# Altium PCB Antenna_base_v3.PcbDoc (part 2 of 2)
Units mil, origin at the board's own origin, x right, y up, seen from the top; angles counter-clockwise.
Board outline 2245 x 2630 mil, 2 copper layers (Top Layer, Bottom Layer); 85 components, 87 nets, 365 pads, 73 vias.
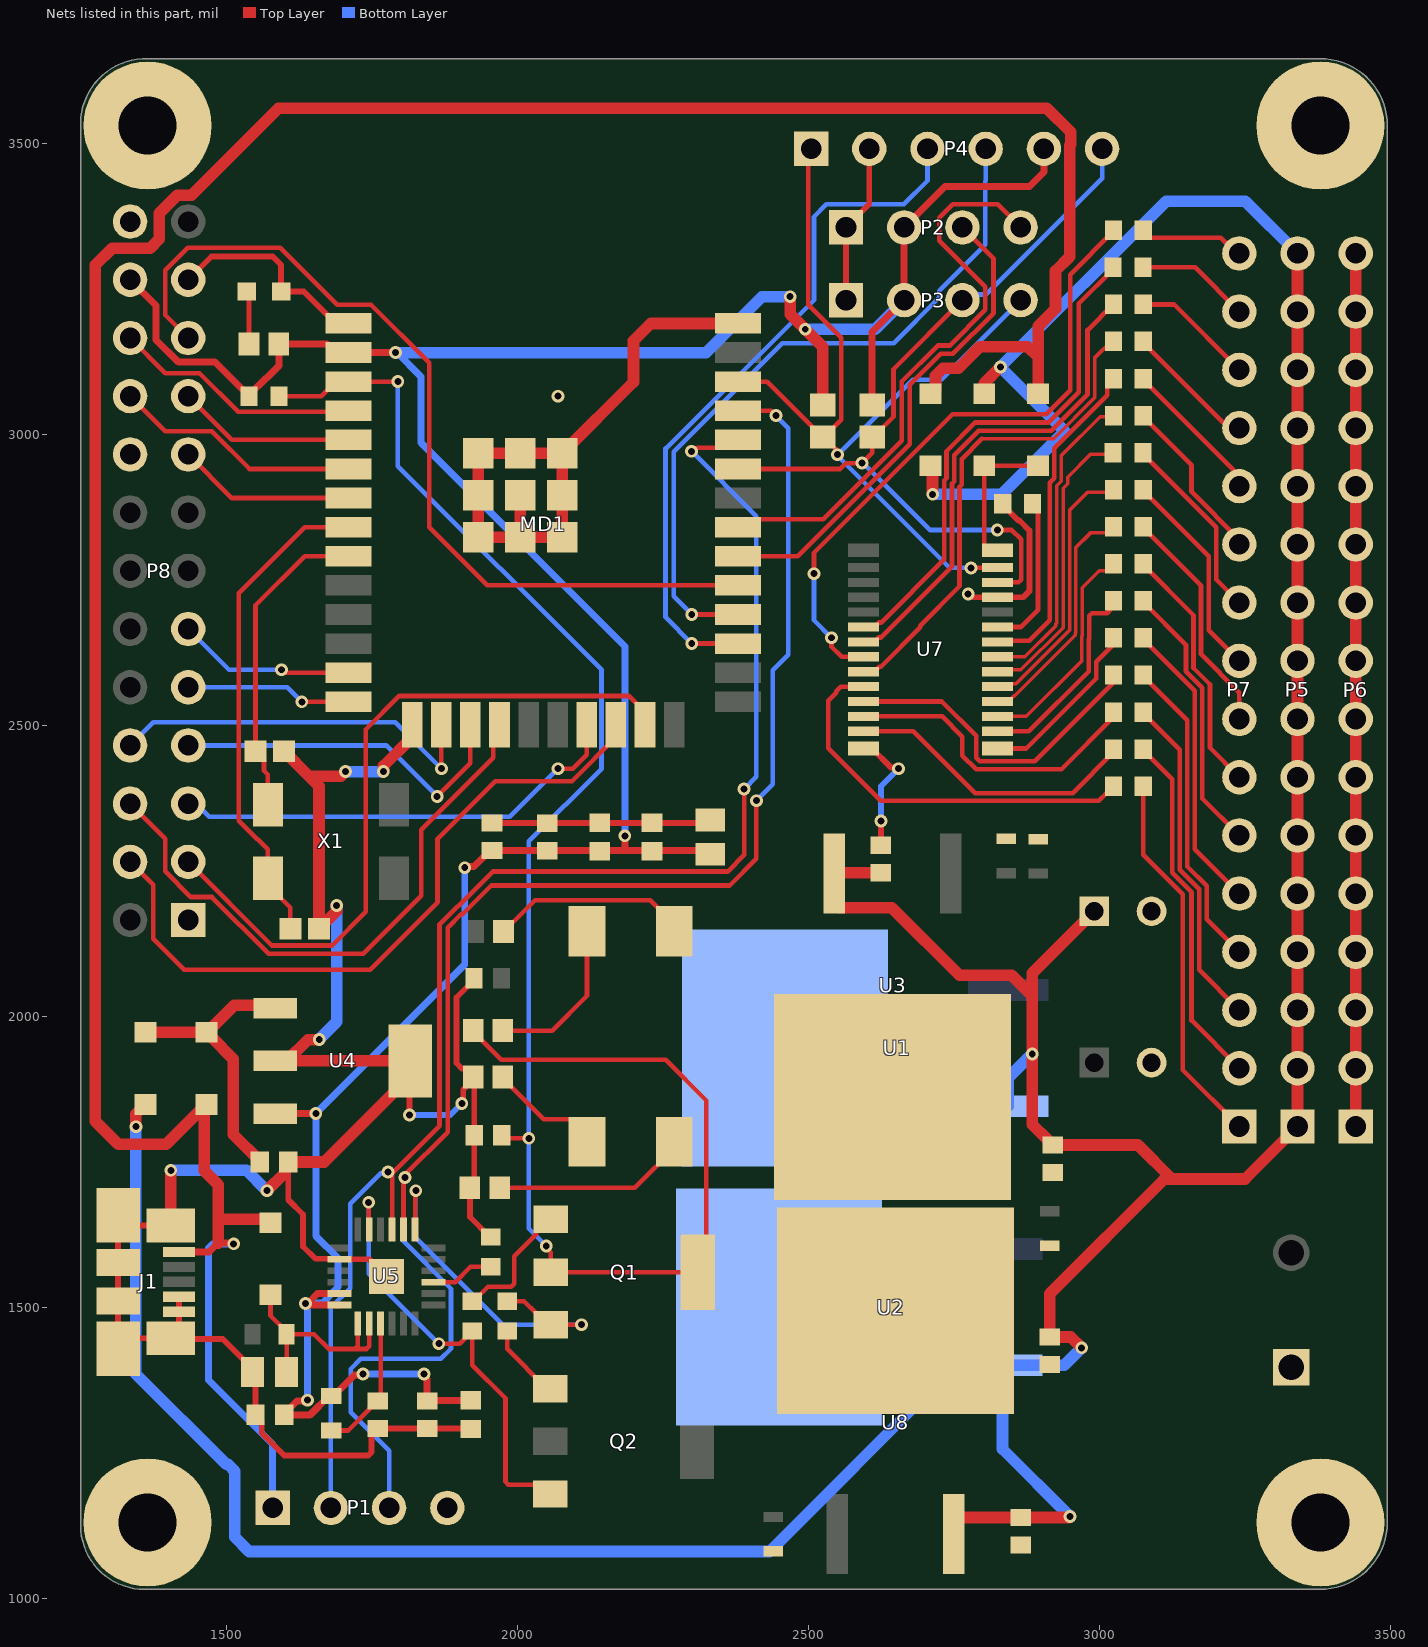
[diagram p2: the nets of this part, all layers, seen from the top]

## Via types
v1: diameter 22, hole 12, Top Layer to Bottom Layer, 73 vias

## Nets (pads, with @x,y where several pads share a name; then routed paths per layer and width w, separated by ;. In a path a pad name is that pad's centre, name@x,y a point inside that pad or via, vN(x,y) a via of type N, cw(c..) or ccw(c..) an arc to the next point about the centre after c; other vN are vias at no path point) (continued)
DTR: Q2.3 R6.1 U5.23 | length 774.6
  Top Layer w8: v1(1745,1680) 1745,1634.22 U5.23@1745.81,1633.41 ; v1(1865.41,1437.11) 1901.28,1437.11 R6.1@1923.03,1458.86 1923.03,1400.03 1980,1343.06 1980,1200 1985,1195 2040.94,1195 Q2.3@2057.05,1178.9
  Bottom Layer w8: v1(1745,1680) 1745,1557.51 v1(1865.41,1437.11)
EN: C12.1 MD1.3 Q1.2 R1.2 R8.2 | length 3010.3
  Top Layer w8: R1.2@1590.59,3065 1663.35,3065 1688.35,3090 MD1.3@1710,3090 v1(1795,3090) ; R8.2@1924.41,1975 1924.41,1973.03 1972.76,1924.69 2255.31,1924.69 2325,1855 2325,1575 Q1.2@2310,1560 Q1.2@2058.03,1560 2058.03,1593.85 2050,1601.88 v1(2050,1605) ; C12.1@1973.62,1795 1978.62,1790 v1(2020,1790)
  Bottom Layer w8: v1(1795,3090) 1795,2945 2145,2595 2145,2425 2020,2300 v1(2020,1790) 2020,1635 v1(2050,1605)
GND: C1.2 C2.1 C3.2 C4.1 C5.2 C6.1 C7.1 C8.1 C9.2 C10.2 C11.1 C12.2 C13.2 C14.2 C15.2 C18.2 C19.1 C22.1 C23.1 C24.1 C25.2 C26.2 C27.1 C28.1 C29.1 D8.1 J1.4 J1.5 J1.6 J1.7 J1.8 J1.9 J1.10 J1.11 J5.1 MD1.1 MD1.15 MD1.38 MD1.39 P1.4 P2.1 P3.1 P4.2 P6.1 P6.2 P6.3 P6.4 P6.5 P6.6 P6.7 P6.8 P6.9 P6.10 P6.11 P6.12 P6.13 P6.14 P6.15 P6.16 P8.1 P8.18 P8.23 P8.26 pad.C1 pad.C2 pad.C3 pad.C4 R10.1 R11.1 R24.2 R45.2 U1.4 U2.4 U3.4 U4.2 U4.4 U5.2 U5.25 U7.14 U7.25 U8.4 | length 8073.9
  Top Layer w10: J1.6@1404.92,1640.37 1332.09,1640.37 J1.8@1314.37,1658.09 J1.9@1314.37,1576.4 J1.10@1314.37,1510.45 J1.11@1314.37,1428.76 1332.09,1446.48 J1.7@1404.92,1446.48 ; J1.4@1419.09,1517.83 J1.5@1419.09,1492.24 1419.09,1460.65 J1.7@1404.92,1446.48 ; P8.23@1435,3265 1475,3305 1580,3305 1594.53,3290.47 D8.1@1594.53,3245 1633.35,3245 1688.35,3190 MD1.1@1710,3190 ; C8.1@1606.85,1749.21 1606.85,1684.61 1632.24,1659.21 1632.24,1604.21 1653.39,1583.07 1693.66,1583.07 U5.2@1694.57,1582.17 1745.81,1582.17 U5.25@1775.34,1552.64 ; v1(1815,1830) 1815,1895.75 1815,1921.34 U4.4@1816.61,1922.95 ; v1(1905,1850) 1907.3,1852.3 1907.3,1873.95 1911.69,1878.35 1911.69,1880.31 1924.41,1893.03 1926.38,1893.03 C12.2@1926.38,1795 1926.38,1712.56 R11.1@1918.82,1705 1918.82,1654.8 1953.03,1620.59 R45.2@1955,1620.59 ; 1905,1910 1895.69,1919.31 1895.69,2031.83 1925.94,2062.09 C13.2@1925.94,2065.04 ; C11.1@1919.49,1291.57 C10.2@1845.47,1291.57 C9.2@1760.47,1291.57 1759.76,1291.57 1750,1281.81 1750,1250.86 1744.14,1245 1600,1245 1561.14,1283.86 1561.14,1304.25 C7.1@1550.39,1315 1550.39,1383.07 C29.1@1545.04,1388.43 1545.04,1394.33 1494.37,1445 1406.4,1445 J1.7@1404.92,1446.48 ; C25.2@1956.73,2331.73 2326.42,2331.73 C24.1@2331.73,2337.05 ; P3.1@2565,3230 P2.1@2565,3355 2605,3395 P4.2@2605,3490 ; U7.14@2594.84,2459.72 2609.61,2459.72 2642.03,2427.3 2652.7,2427.3 v1(2655,2425) ; C5.2@2625,2293.62 v1(2625,2335) ; v1(2775,2725) 2778.25,2725 2783.68,2719.57 U7.25@2825.16,2719.57 2869.57,2719.57 2880,2730 2880,2834.41 2863.07,2851.34 2861.1,2851.34 2834.41,2878.03 R24.2@2834.41,2880
  Top Layer w20: J1.6@1404.92,1640.37 1405,1640.45 v1(1405,1735) ; v1(1570,1700) 1601.1,1731.1 ; U4.2@1584.33,1922.95 U4.2@1604.02,1922.95 ; C28.1@1599.61,2455 1642.3,2412.3 ; C8.1@1606.85,1749.21 1668.46,1749.21 U4.4@1815,1895.75 ; v1(1660,1960) 1659.62,1959.62 1640.68,1959.62 U4.2@1604.02,1922.95 ; v1(1690,2190) 1689.62,2189.62 1689.62,2180.01 C27.1@1659.61,2150 1659.61,2395 1642.3,2412.3 ; v1(1705,2420) 1697.3,2412.3 1642.3,2412.3 ; v1(1770,2420) 1770.38,2420.38 1770.38,2429.71 1819.65,2478.98 MD1.15@1819.65,2500.63 ; U4.4@1816.61,1922.95 U4.2@1604.02,1922.95 ; MD1.39@2005.28,2894.72 MD1.39@2005.28,2822.48 ; MD1.38@2379.29,3190 2230,3190 2200,3160 2200,3089.45 MD1.39@2077.52,2966.97 ; P6.1@3440.79,1810.35 P6.2@3440.79,1910.35 P6.3@3440.79,2010.35 P6.4@3440.79,2110.35 P6.5@3440.79,2210.35 P6.6@3440.79,2310.35 P6.7@3440.79,2410.35 P6.8@3440.79,2510.35 P6.9@3440.79,2610.35 P6.10@3440.79,2710.35 P6.11@3440.79,2810.35 P6.12@3440.79,2910.35 P6.13@3440.79,3010.35 P6.14@3440.79,3110.35 P6.15@3440.79,3210.35 P6.16@3440.79,3310.35 ; MD1.39@2005.28,2822.48 MD1.39@1933.03,2822.48 MD1.39@1933.03,2894.72 MD1.39@1933.03,2966.97 MD1.39@2005.28,2966.97 MD1.39@2077.52,2966.97 ; MD1.39@2005.28,2822.48 MD1.39@2077.52,2822.48 MD1.39@2077.52,2894.72 MD1.39@2077.52,2966.97
  Bottom Layer w10: v1(1815,1830) 1885,1830 v1(1905,1850) ; v1(2625,2335) 2625,2395 v1(2655,2425)
  Bottom Layer w20: v1(1405,1735) 1535,1735 v1(1570,1700) ; v1(1660,1960) 1690,1990 v1(1690,2190) ; v1(1705,2420) v1(1770,2420)
  other v1: 2070,3065
I2C_SCL: MD1.30 P2.3 | length 841.3
  Top Layer w8: MD1.30@2379.29,2790 2482,2790 2674.56,2982.57 2674.56,3084.42 2728.15,3138 2748.7,3138 2818.53,3207.83 2818.53,3301.47 P2.3@2765,3355
I2C_SCL2: MD1.33 P3.3 P4.6 R23.1 U7.26 | length 1421.4
  Top Layer w8: MD1.33@2379.29,2940 2555,2940 2565,2950 v1(2592.5,2950) 2610,2967.5 R23.1@2610,2995 ; R23.1@2592.35,2979.31 2608.03,2995 R23.1@2610,2995 ; P3.3@2765,3230 2646.56,3111.56 2646.56,3029.6 2611.97,2995 R23.1@2610,2995 ; v1(2825,2835) 2850,2835 2866,2819 2866,2749.84 2861.31,2745.16 U7.26@2825.16,2745.16
  Top Layer w20: P3.3@2765,3230 P3.3@2772.11,3237.11
  Bottom Layer w8: v1(2592.5,2950) 2595,2950 2710,2835 v1(2825,2835) ; P3.3@2765,3230 2774.77,3239.77 2805.67,3239.77 3005,3439.1 P4.6@3005,3490
I2C_SDA: MD1.31 P2.4 | length 995.6
  Top Layer w8: MD1.31@2379.29,2840 2393.01,2853.72 2525.91,2853.72 2660.56,2988.37 2660.56,3090.21 2722.35,3152 2742.9,3152 2804.53,3213.63 2804.53,3252.97 2725.47,3332.03 2725.47,3371.37 2748.63,3394.53 2825.47,3394.53 P2.4@2865,3355
I2C_SDA2: MD1.36 P3.4 P4.1 R22.1 U7.27 | length 1542.3
  Top Layer w8: MD1.36@2379.29,3090 2429.64,3090 2507.35,3012.29 2507.35,3010.69 2523.03,2995 R22.1@2525,2995 R22.1@2526.97,2995 ; P4.1@2505,3490 2500,3485 2500,3221.8 2556.65,3165.15 2556.65,3024.69 R22.1@2526.97,2995 ; v1(2550.58,2964.42) 2548.67,2966.33 2548.67,2973.3 R22.1@2526.97,2995 ; v1(2780,2770) 2824.41,2770 U7.27@2825.16,2770.75
  Bottom Layer w8: v1(2780,2770) 2742.8,2770 2550.58,2962.22 v1(2550.58,2964.42) 2679.44,3093.28 2728.28,3093.28 P3.4@2865,3230
IO5: MD1.29 P8.21 | length 1538.1
  Top Layer w8: P8.21@1435,3165 1395.47,3204.53 1395.47,3281.37 1434.1,3320 1593.02,3320 1690.76,3222.27 1748.96,3222.27 1848.98,3122.24 1848.98,2840.02 1949.01,2740 MD1.29@2379.29,2740
IO12: MD1.14 P8.9 | length 285.4
  Top Layer w8: v1(1630,2540) MD1.14@1710,2540
  Bottom Layer w8: P8.9@1435,2565 1605,2565 v1(1630,2540)
IO13: MD1.16 P8.8 | length 660.1
  Top Layer w8: MD1.16@1869.65,2500.63 1869.65,2425.35 v1(1870,2425)
  Bottom Layer w8: P8.8@1335,2465 1374.53,2504.53 1790.47,2504.53 v1(1870,2425)
IO14: MD1.13 P8.11 | length 306.1
  Top Layer w8: v1(1595,2595) 1598.79,2595 1603.79,2590 MD1.13@1710,2590
  Bottom Layer w8: P8.11@1435,2665 1505,2595 v1(1595,2595)
IO15: MD1.23 P8.3 | length 1238.4
  Top Layer w8: P8.3@1435,2265 1578.7,2121.3 1682.45,2121.3 1740.12,2178.97 1740.12,2492.33 1797.79,2550 2191.93,2550 2219.65,2522.28 MD1.23@2219.65,2500.63
IO16: MD1.27 P4.3 | length 1212.4
  Top Layer w8: v1(2300,2640) MD1.27@2379.29,2640
  Bottom Layer w8: v1(2300,2640) 2255,2685 2255,2975 2510,3230 2510,3373.2 2531.33,3394.53 2664.53,3394.53 2705,3435 P4.3@2705,3490
IO17: MD1.28 P4.4 | length 1231.2
  Top Layer w8: v1(2300,2690) MD1.28@2379.29,2690
  Bottom Layer w8: v1(2300,2690) 2269,2721 2269,2969.2 2455.8,3156 2646.9,3156 2725.47,3234.57 2725.47,3246.37 2804.53,3325.43 2804.53,3434.53 2805,3435 P4.4@2805,3495.12
IO32: C27.2 MD1.8 X1.1 | length 849
  Top Layer w8: C27.2@1610.39,2150 1610.39,2186.54 1571.73,2225.2 X1.1@1571.73,2237.01 1571.73,2286.41 1554.21,2303.93 1553.66,2303.93 1521.69,2335.9 1521.69,2726.69 1635,2840 MD1.8@1710,2840
IO33: C28.2 MD1.9 X1.4 | length 566.7
  Top Layer w8: C28.2@1535.69,2460 C28.2@1550.39,2445.3 ; X1.4@1571.73,2362.99 1571.73,2415.03 1565.09,2421.67 1565.09,2440.3 C28.2@1550.39,2455 1550.39,2705.39 1635,2790 MD1.9@1710,2790
IO34: MD1.6 P8.20 | length 426.8
  Top Layer w8: P8.20@1335,3065 1395.47,3004.53 1475.67,3004.53 1540.2,2940 MD1.6@1710,2940
IO35: MD1.7 P8.17 | length 306.1
  Top Layer w8: P8.17@1435,2965 1510,2890 MD1.7@1710,2890
LED0: R2.1 U7.6 | length 881.7
  Top Layer w8: U7.6@2594.84,2668.39 2613.54,2668.39 2621.26,2676.1 2625.56,2676.1 2734,2784.54 2734,2920.13 2737.7,2923.83 2737.7,2970.63 2786.93,3019.86 2913.1,3019.86 2965,3071.76 2965,3224.21 3023.82,3283.03 R2.1@3023.82,3285
LED1: R3.1 U7.7 | length 846.7
  Top Layer w8: U7.7@2594.84,2642.8 2613.54,2642.8 2621.26,2650.51 2625.56,2650.51 2747,2771.95 2747,2914.75 2750.7,2918.45 2750.7,2963.83 2792.72,3005.86 2917.48,3005.86 2980,3068.38 2980,3178.62 3024.41,3223.03 R3.1@3024.41,3225
LED2: R4.1 U7.8 | length 1096.8
  Top Layer w8: v1(2510,2760) 2510,2795.84 2748.02,3033.86 2908.71,3033.86 2950,3075.15 2950,3273.62 3024.41,3348.03 R4.1@3024.41,3350 ; v1(2540,2650) 2540,2635 2557.8,2617.2 U7.8@2594.84,2617.2
  Bottom Layer w8: v1(2510,2760) 2510,2680 v1(2540,2650)
LED3: R12.1 U7.9 | length 834.2
  Top Layer w6: 2798.52,2991.86 2921.86,2991.86 2992,3062 2992,3130.62 R12.1@3024.41,3163.03
  Top Layer w8: U7.9@2594.84,2591.61 2613.54,2591.61 2622.26,2600.33 2625.15,2600.33 2692.57,2667.76 2692.57,2670.86 2760,2738.28 2760,2909.36 2763.7,2913.06 2763.7,2957.04 2798.52,2991.86
LED4: R13.1 U7.10 | length 694.9
  Top Layer w8: U7.10@2596.83,2568.01 U7.10@2594.84,2566.02 2556.02,2566.02 2548,2558 2548,2555.52 2534.55,2542.07 2534.55,2460.45 2625,2370 2999.41,2370 3011.68,2382.27 3013.65,2382.27 3024.41,2393.03 R13.1@3024.41,2395
LED5: R14.1 U7.11 | length 552
  Top Layer w8: U7.11@2594.84,2540.43 2729.57,2540.43 2788.58,2481.42 2788.58,2443.77 2794.44,2437.91 2889.29,2437.91 3024.41,2573.03 R14.1@3024.41,2575
LED6: R15.1 U7.12 | length 525.1
  Top Layer w8: U7.12@2594.84,2514.84 2730.16,2514.84 2765,2480 2765,2447.55 2788.64,2423.91 2935.29,2423.91 3024.41,2513.03 R15.1@3024.41,2515
LED7: R16.1 U7.13 | length 485.9
  Top Layer w8: U7.13@2613.54,2489.25 2680.75,2489.25 2787,2383 2954.38,2383 3024.41,2453.03 R16.1@3024.41,2455
LED8: R17.1 U7.15 | length 291.8
  Top Layer w8: U7.15@2825.16,2459.72 2874.72,2459.72 2995,2580 2995,2608.62 3024.41,2638.03 R17.1@3024.41,2640
LED9: R18.1 U7.16 | length 335.6
  Top Layer w8: U7.16@2825.16,2489.25 2879.25,2489.25 2982,2592 2982,2647.8 2983,2648.8 2983,2687.58 2987.69,2692.27 3013.65,2692.27 R18.1@3019.03,2697.65
LED10: R19.1 U7.17 | length 378.2
  Top Layer w6: U7.17@2825.16,2514.84 2874.84,2514.84 2970,2610 2970,2652.77 2971,2653.77 2971,2736 3000,2765 3019.41,2765 R19.1@3024.41,2770
LED11: R20.1 U7.18 | length 407
  Top Layer w6: U7.18@2825.16,2540.43 2843.86,2540.43 2853.57,2550.15 2855.05,2550.15 2959,2654.1 2959,2657.33 2960,2658.33 2960,2805 2985,2830 R20.1@3024.41,2830
LED12: R21.1 U7.19 | length 479.8
  Top Layer w6: U7.19@2825.16,2566.02 2830.03,2570.9 2857.01,2570.9 2949,2662.89 2949,2869 2980,2900 3022.44,2900 R21.1@3024.41,2898.03
  Top Layer w8: U7.19@2825.16,2566.02 U7.19@2843.86,2566.02 ; R21.1@3024.41,2898.03 R21.1@3024.41,2900
LED13: R25.1 U7.20 | length 500.1
  Top Layer w6: U7.20@2825.16,2591.61 2828.54,2595 2865.56,2595 2938,2667.44 2938,2906.6 2946,2914.6 2946,2926 2985,2965 R25.1@3023.82,2965
LED14: R26.1 U7.21 | length 536
  Top Layer w6: U7.21@2825.16,2617.2 2872.2,2617.2 2925,2670 2925,2673.03 2927,2675.03 2927,2911.16 2935,2919.16 2935,2963.03 3001.97,3030 R26.1@3024.41,3030
LED15: R27.1 U7.22 | length 552.1
  Top Layer w8: U7.22@2847.73,2645 2880,2645 2915,2680 2915,2916.13 2922.7,2923.83 2922.7,2975.66 3013.65,3066.6 3013.65,3094.24 R27.1@3024.41,3105
NetC8_2: C8.2 D1.1 D2.1 U4.1 | length 493.7
  Top Layer w20: D1.1@1361.3,1972.09 D2.1@1466.3,1972.09 D2.1@1467.28,1972.09 ; C8.2@1557.64,1749.21 1557.64,1751.18 1512.24,1796.57 1512.24,1926.14 1475,1963.39 1475,1964.37 D2.1@1467.28,1972.09 ; U4.1@1575.47,2018.62 1513.82,2018.62 D2.1@1467.28,1972.09
NetC9_1: C9.1 R44.1 U5.9 | length 237.9
  Top Layer w8: R44.1@1680.47,1287.95 1709.61,1287.95 1746.76,1325.1 1746.76,1328.06 1757.52,1338.82 C9.1@1760.47,1338.82 1765.5,1343.84 U5.9@1765.5,1471.87
NetD5_1: D5.1 D6.1 U7.28 | length 255.5
  Top Layer w8: U7.28@2825.16,2800.28 2810.39,2800.28 2802.58,2808.09 2802.58,2869.78 2802.5,2869.86 D6.1@2802.5,2945.28 D5.1@2895,2945.28
NetD8_2: D8.2 R43.2 | length 91.6
  Top Layer w8: D8.2@1535.47,3245 1539.41,3241.06 R43.2@1539.41,3155
NetP7_1: P7.1 R13.2 | length 653.1
  Top Layer w8: R13.2@3075.59,2395 3075.59,2277.54 3143.8,2209.33 3143.8,1907.34 P7.1@3240.79,1810.35
NetP7_2: P7.2 R16.2 | length 616.7
  Top Layer w8: R16.2@3075.59,2458.67 3075.59,2456.7 3125.35,2406.94 3125.35,2246.16 3158.69,2212.83 3158.69,1992.46 P7.2@3240.79,1910.35
NetP7_3: P7.3 R15.2 | length 580.4
  Top Layer w8: R15.2@3075.59,2522.33 3075.59,2520.36 3138.35,2457.6 3138.35,2251.55 3171.69,2218.21 3171.69,2079.46 P7.3@3240.79,2010.35
NetP7_4: P7.4 R14.2 | length 544.1
  Top Layer w8: R14.2@3075.59,2586 3075.59,2584.03 3151.35,2508.27 3151.35,2256.93 3184.69,2223.6 3184.69,2166.46 P7.4@3240.79,2110.35
NetP7_5: P7.5 R17.2 | length 507.7
  Top Layer w8: R17.2@3075.59,2649.67 3075.59,2647.7 3164.35,2558.94 3164.35,2286.79 P7.5@3240.79,2210.35
NetP7_6: P7.6 R18.2 | length 471.4
  Top Layer w8: R18.2@3075.59,2713.33 3075.59,2711.36 3149.03,2637.93 3149.03,2592.65 3177.35,2564.32 3177.35,2373.79 P7.6@3240.79,2310.35
NetP7_7: P7.7 R19.2 | length 435.1
  Top Layer w8: R19.2@3075.59,2777 3075.59,2775.03 3162.03,2688.59 3162.03,2598.03 3190.35,2569.71 3190.35,2460.79 P7.7@3240.79,2410.35
NetP7_8: P7.8 R20.2 | length 398.7
  Top Layer w8: R20.2@3075.59,2840.67 3075.59,2838.7 3175.03,2739.26 3175.03,2621.63 3240.79,2555.87 P7.8@3240.79,2510.35
NetP7_9: P7.9 R21.2 | length 362.4
  Top Layer w8: R21.2@3075.59,2904.33 3075.59,2902.36 3188.03,2789.93 3188.03,2663.11 P7.9@3240.79,2610.35
NetP7_10: P7.10 R25.2 | length 326.3
  Top Layer w8: R25.2@3075,2968 3075,2966.03 3201.03,2840 3201.03,2750.11 P7.10@3240.79,2710.35
NetP7_11: P7.11 R26.2 | length 289.7
  Top Layer w8: R26.2@3075.59,3031.67 3075.59,3029.7 3158.69,2946.6 3158.69,2900.73 3240.79,2818.63 P7.11@3240.79,2810.35
NetP7_12: P7.12 R27.2 | length 253.4
  Top Layer w8: R27.2@3075.59,3095.33 3075.59,3093.36 3231.02,2937.94 3231.02,2920.12 P7.12@3240.79,2910.35
NetP7_13: P7.13 R12.2 | length 227.9
  Top Layer w8: R12.2@3075.59,3159 3075.59,3157.03 3212.5,3020.12 3231.02,3020.12 P7.13@3240.79,3010.35
NetP7_14: P7.14 R3.2 | length 211.7
  Top Layer w8: R3.2@3075.59,3222.67 3128.48,3222.67 P7.14@3240.79,3110.35
NetP7_15: P7.15 R2.2 | length 197.3
  Top Layer w8: R2.2@3075,3286.33 3164.81,3286.33 P7.15@3240.79,3210.35
NetP7_16: P7.16 R4.2 | length 182.8
  Top Layer w8: R4.2@3075.59,3350 3075.59,3348.03 3086.35,3337.27 3208.97,3337.27 3235.88,3310.35 P7.16@3240.79,3310.35
NetQ1_1: Q1.1 R6.2 | length 224.5
  Top Layer w8: R6.2@1923.03,1510.04 1925,1510.04 1949.96,1535 1990,1535 1995,1540 1995,1587.52 2032.5,1625.02 2032.5,1630.93 2052.13,1650.55 Q1.1@2058.03,1650.55
NetQ2_1: Q2.1 R7.2 | length 133
  Top Layer w8: R7.2@1983.03,1458.86 1983.03,1428.11 2051.14,1360 Q2.1@2057.05,1360
NetR8_1: R8.1 SW1.1 | length 280.2
  Top Layer w8: R8.1@1975.59,1975 2060,1975 2120,2035 SW1.1@2120,2145.91
NetR9_1: R9.1 SW2.1 | length 346.1
  Top Layer w8: R9.1@1976.54,2145.04 1976.54,2147.01 1990.25,2160.72 1992.22,2160.72 2030.71,2199.21 2228.5,2199.21 2270,2157.72 SW2.1@2270,2145.91
NetR10_2: R10.2 SW1.2 | length 198.2
  Top Layer w8: R10.2@1975.59,1895 1975.59,1893.03 2045.61,1823.01 2092.5,1823.01 2120,1795.51 SW1.2@2120,1784.09
NetR11_2: R11.2 SW2.2 | length 346.5
  Top Layer w8: R11.2@1970,1705 2202.32,1705 2275,1777.68 SW2.2@2275,1789.09
NetR24_1: R24.1 U7.23 | length 268.1
  Top Layer w8: U7.23@2825.16,2668.39 2865.5,2668.39 2895,2697.89 2895,2870.59 R24.1@2885.59,2880
NetR45_1: R45.1 U5.15 | length 109.9
  Top Layer w8: U5.15@1856.11,1542.8 1893.3,1542.8 1919.91,1569.41 R45.1@1955,1569.41
PWM_VDD: C1.1 C3.1 C5.1 C14.1 C18.1 D1.2 D6.2 D7.1 P5.1 P5.2 P5.3 P5.4 P5.5 P5.6 P5.7 P5.8 P5.9 P5.10 P5.11 P5.12 P5.13 P5.14 P5.15 P5.16 U1.3 U2.3 U3.3 U8.3 | length 7686.6
  Top Layer w20: v1(1345,1810) 1345,1831.77 D1.2@1361.3,1848.07 ; C5.1@2625,2246.38 2546.38,2246.38 U3.3@2545,2245 2545,2194.8 2553.7,2186.1 2643.8,2186.1 2759.9,2070 2850,2070 2885,2035 ; D7.1@2710,2945.28 2713.62,2941.66 2713.62,2896.89 v1(2714,2896.51) ; U8.3@2750,1110 2750,1129.92 2758.7,1138.62 C18.1@2865,1138.62 2948.08,1138.62 2949.46,1140 v1(2950,1140) ; D6.2@2802.5,3069.29 2802.5,3087.51 v1(2830.22,3115.22) ; v1(2970,1430) 2951.38,1448.62 C3.1@2915,1448.62 2915,1522.85 3112.15,1720 3125,1720 ; C14.1@2991.57,2180 2885,2073.43 2885,2035 ; P5.16@3340.79,3310.35 P5.15@3340.79,3210.35 P5.14@3340.79,3110.35 P5.13@3340.79,3010.35 P5.12@3340.79,2910.35 P5.11@3340.79,2810.35 P5.10@3340.79,2710.35 P5.9@3340.79,2610.35 P5.8@3340.79,2510.35 P5.7@3340.79,2410.35 P5.6@3340.79,2310.35 P5.5@3340.79,2210.35 P5.4@3340.79,2110.35 P5.3@3340.79,2010.35 P5.2@3340.79,1910.35 P5.1@3340.79,1810.35 3250.43,1720 3125,1720 ; 2885,2035 v1(2885,1935) 2885,1813.62 2912.28,1786.34 2912.28,1783.39 2917.05,1778.62 C1.1@2920,1778.62 3066.38,1778.62 3125,1720
  Bottom Layer w20: v1(1345,1810) 1345,1385 1500,1230 1503.28,1230 1515,1218.28 1515,1105 1540,1080 2433.53,1080 2730,1376.47 2730,1383.28 2738.01,1391.3 2825.16,1391.3 U2.3@2833.86,1400 ; v1(2714,2896.51) 2832.29,2896.51 2940.61,3004.83 v1(2830.22,3115.22) 3114.99,3400 3251.14,3400 P5.16@3340.79,3310.35 ; U1.3@2843.86,1845 2843.86,1893.86 v1(2885,1935) ; v1(2950,1140) 2833.86,1256.14 U2.3@2833.86,1400 ; v1(2970,1430) 2940,1400 U2.3@2833.86,1400
RTS: Q1.3 R7.1 U5.19 | length 639.4
  Top Layer w8: U5.19@1824.55,1633.41 1825.21,1634.07 1825.21,1699.34 v1(1825.87,1700) ; R7.1@1983.03,1510.04 2011.76,1510.04 2032.5,1489.3 2032.5,1489.07 2052.13,1469.45 Q1.3@2058.03,1469.45 2109.99,1469.45 v1(2110.31,1469.78)
  Bottom Layer w8: v1(1825.87,1700) 1825,1699.13 1825,1620 1975.22,1469.78 v1(2110.31,1469.78)
RXD0: MD1.34 P1.2 U5.21 | length 2588.5
  Top Layer w8: v1(1777.91,1732.08) 1779.81,1730.18 v1@1785.18,1730.18 ; U5.21@1785.18,1633.41 v1@1785.18,1730.18 ; v1(2299.75,2970.25) 2303.54,2970.25 2309.57,2976.28 2365.57,2976.28 MD1.34@2379.29,2990 ; v1(2390,2390) 2390,2276.84 2361.47,2248.31 1958.31,2248.31 1898.72,2188.72 1897.7,2188.72 1866.69,2157.72 1866.69,1811.69 v1@1785.18,1730.18
  Bottom Layer w8: P1.2@1680,1165 1680,1499.34 1713.04,1532.38 1713.04,1677.73 1764.7,1729.4 1775.23,1729.4 v1(1777.91,1732.08) ; v1(2299.75,2970.25) 2411,2859 2411,2411 v1(2390,2390)
SD0: MD1.21 P8.5 | length 790
  Top Layer w8: v1(2070,2425) 2095.87,2425 2119.65,2448.78 MD1.21@2119.65,2500.63
  Bottom Layer w8: P8.5@1435,2365 1448.43,2365 1471.08,2342.35 1987.35,2342.35 v1(2070,2425)
SD1: MD1.22 P8.4 | length 1217.3
  Top Layer w8: P8.4@1335,2265 1374.53,2225.47 1374.53,2132.48 1427.7,2079.3 1747.29,2079.3 1863.28,2195.29 1863.28,2304.7 1962.16,2403.58 2094.25,2403.58 2169.65,2478.98 MD1.22@2169.65,2500.63
SD2: MD1.17 P8.7 | length 610.8
  Top Layer w8: v1(1862.65,2377.35) 1919.65,2434.34 MD1.17@1919.65,2500.63
  Bottom Layer w8: P8.7@1435,2465 1775,2465 v1(1862.65,2377.35)
SD3: MD1.18 P8.6 | length 1030.4
  Top Layer w8: P8.6@1335,2365 1395.47,2304.53 1395.47,2280.23 1395.47,2248.63 1439.57,2204.53 1475.67,2204.53 1572.9,2107.3 1735.69,2107.3 1835.28,2206.88 1835.28,2320.28 1958.95,2443.95 1958.95,2489.93 MD1.18@1969.65,2500.63
SENSOR_VN: MD1.5 P8.19 | length 306.1
  Top Layer w8: P8.19@1435,3065 1510,2990 MD1.5@1710,2990
SENSOR_VP: MD1.4 P8.22 | length 428.2
  Top Layer w8: P8.22@1335,3165 1395.47,3104.53 1454.24,3104.53 1520.5,3038.27 1708.27,3038.27 MD1.4@1710,3040
TXD0: MD1.35 P1.3 U5.20 | length 2814.9
  Top Layer w8: U5.20@1804.87,1633.41 v1@1804.87,1720.17 ; v1@1806.18,1726.18 1880.69,1800.69 1880.69,2151.92 1903.5,2174.72 1906.07,2174.72 1955.67,2224.33 2365,2224.33 2411,2270.33 v1(2411,2370) ; MD1.35@2383.29,3036 MD1.35@2379.29,3040 2436.21,3040 ; MD1.35@2383.29,3040 2436.21,3040 ; v1(2444.54,3031.67) 2436.21,3040
  Bottom Layer w8: P1.3@1780,1165 1780,1253.26 1714,1319.26 1714,1393.7 1731.35,1411.05 1869.05,1411.05 1886.41,1428.41 1886.41,1531.52 1804.87,1613.07 1804.87,1720.17 v1(1807.35,1722.65) ; v1(2411,2370) 2439.41,2398.41 2439.41,2594.44 2466,2621.03 2466,3010.21 v1(2444.54,3031.67)
USB5V: C29.2 D3.1 R5.1 U5.7 U5.8 | length 383.2
  Top Layer w8: D3.1@1576.3,1521.06 1576.3,1485.16 1604.09,1457.36 R5.1@1604.09,1453.43 ; C29.2@1604.09,1388.43 R5.1@1604.09,1453.43 ; U5.7@1726.13,1471.87 1726.13,1432.9 1721.3,1428.07 ; U5.8@1745.81,1471.87 1745.81,1432.76 1741.12,1428.07 1721.3,1428.07 ; R5.1@1604.09,1453.43 1650.94,1453.43 1676.3,1428.07 1721.3,1428.07
USB5V4: D2.2 D3.2 D5.2 D7.2 J1.1 P1.1 | length 5227.7
  Top Layer w8: D5.2@2881.28,3083.01 D5.2@2895,3069.29
  Top Layer w12: J1.1@1419.09,1594.61 1470.83,1594.61 1486.3,1610.08 1511.63,1610.08 v1(1512.96,1608.75)
  Top Layer w20: 1486.3,1610.08 1486.3,1651.06 ; D3.2@1576.3,1645.08 1570.32,1651.06 1486.3,1651.06 ; D7.2@2710,3069.29 2710.98,3069.29 2718.7,3077.01 2718.7,3100.27 2731.72,3113.28 2758.28,3113.28 2795,3150 2877.45,3150 2895,3132.45 ; D5.2@2895,3069.29 2895,3132.45 ; 1486.3,1651.06 1486.3,1710.2 1462.24,1734.26 1462.24,1844.02 1461.26,1844.02 1397.24,1780 1315,1780 1275.47,1819.53 1275.47,3290.47 1304.47,3319.47 1369.47,3319.47 1385,3335 1385,3379.39 1416.14,3410.53 1440.53,3410.53 1590,3560 2910,3560 2951,3519 2951,3497.49 2949.53,3496.01 2949.53,3304.53 2925,3280 2925,3215 2895,3185 2895,3132.45
  Bottom Layer w12: v1(1512.96,1608.75) 1477.03,1608.75 1470,1601.72 1470,1375 1580,1265 P1.1@1580,1165
VCC: C7.2 C10.1 C11.2 C22.2 C23.2 C24.2 C25.1 C26.1 MD1.2 P2.2 P3.2 P4.5 P8.24 R1.1 R22.2 R23.2 R43.1 R44.2 U4.3 U5.5 U5.6 | length 5551.9
  Top Layer w12: P8.24@1335,3265 1379.47,3220.53 1379.47,3161.8 1417.8,3123.47 1480.94,3123.47 1528.68,3075.73 1530.65,3075.73 R1.1@1539.41,3066.97 ; R1.1@1539.41,3065 R1.1@1539.41,3066.97 ; U4.3@1584.33,1832.4 v1(1654.06,1832.4) ; v1(1640,1340) 1638.85,1338.85 1621.49,1338.85 1599.61,1316.97 C7.2@1599.61,1315 1644.53,1315 1676.54,1347.01 R44.2@1680.47,1347.01 1684.41,1347.01 1720.49,1383.09 1733.09,1383.09 v1(1735,1385) ; U5.6@1694.57,1503.43 1641.64,1503.43 1639.01,1506.06 v1(1636.3,1506.06) 1638.21,1507.98 1642.07,1507.98 1657.2,1523.11 U5.5@1694.57,1523.11 ; v1(1790.9,3139.81) 1790.7,3140 MD1.2@1710,3140 1688.35,3140 1673.35,3155 R43.1@1590.59,3155 1590.59,3117.31 1569.8,3096.52 1568.96,3096.52 R1.1@1539.41,3066.97 ; v1@1845.47,1376.82 C10.1@1845.47,1338.82 1845.96,1339.31 C11.2@1919.98,1339.31 ; v1(1910,2255) 1911.91,2256.91 1926.2,2256.91 1953.78,2284.49 C25.1@1956.73,2284.49 2185,2284.49 ; v1(2185,2309.73) 2185,2284.49 ; C24.2@2331.73,2277.99 2325.24,2284.49 2185,2284.49 ; R23.2@2610,3050.12 2610,3175 P3.2@2665,3230 P2.2@2665,3355 2735,3425 2880,3425 2905,3450 P4.5@2905,3490
  Top Layer w20: v1(2469.2,3235.94) 2469.2,3205.8 v1(2495,3180) 2525,3150 R22.2@2525,3050.12
  Bottom Layer w12: v1(1636.3,1506.06) 1637.5,1507.27 1665.3,1507.27 1692.24,1534.21 1692.24,1584.21 1654.06,1622.4 v1(1654.06,1832.4) 1910,2088.35 v1(1910,2255) ; v1(1640,1340) 1640,1495.29 ; v1(1735,1385) v1(1840,1385) ; v1@1793.6,3139.81 1835,3098.41 1835,2985 2185,2635 v1(2185,2309.73)
  Bottom Layer w20: v1(1790.9,3139.81) 1793.6,3139.81 2324.56,3139.81 2420.69,3235.94 v1(2469.2,3235.94) ; v1(2495,3180) 2615,3180 P3.2@2665,3230
pads on no net: MD1.32 U5.1 U5.10 U5.11 U5.12 U5.13 U5.14 U5.16 U5.17 U5.18 U5.22 U5.24 X1.2 X1.3

## Polygon pours and split planes (outlines as drawn)
GND on Top Layer "GND_L01_P001" (solid, pour order 1): 1250,3640 1250,1010 3500,1010 3510,1020 3510,3645
no net on Top Layer "NONET_L01_P000" (solid, pour order 0): 1350,3645
GND on Bottom Layer "GND_L02_P002" (solid, pour order 2): 3500,3650 3500,1015 1245,1015 1245,3650

## Other copper
Top Layer:
  pour cut-out: 1721.3,1498.6 1721.3,1606.68 1829.38,1606.68 1829.38,1498.6
  pour cut-out: 1721.3,1498.6 1721.3,1606.68 1829.38,1606.68 1829.38,1498.6

## Silkscreen, mask and mechanical layers (free items; w line width, h text height)
Top Overlay:
  text "RXD2" at 2660,3590 h25
  text "TXD2" at 2770,3590 h25
  text "SDA2" at 2435,3550 h30
  text "G" at 2590,3550 h30
  text "P16" at 2665,3550 h30
  text "P17" at 2770,3550 h30
  text "VCC" at 2860,3550 h30
  text "SCL2" at 2955,3550 h30
  text "G" at 2550,3405 h25
  text "VCC" at 2625,3405 h25
  text "SCL" at 2735,3405 h25
  text "SDA" at 2845,3405 h25
  text "+6V" at 3280,3385 h40
  text "G" at 3425,3385 h40
  text "PWM" at 3165,3380 h40
  text "2" at 3145,3295 h30
  text "2" at 2700,3235 h30
  text "0" at 3145,3190 h30
  text "1" at 3142.5,3090 h30
  text "3" at 3140,2990 h30
  text "15" at 3132.51,2890 h30
  text "14" at 3132.51,2790 h30
  text "13" at 3127.51,2690 h30
  text "12" at 3127.51,2590 h30
  text "11" at 3142.51,2490 h30
  text "10" at 3127.51,2395 h30
  text "9" at 3132.51,2290 h30
  text "8" at 3155,2225 h30
  text "5" at 3155,2090 h30
  text "6" at 3150,1990 h30
  text "7" at 3165,1855 h30
  text "4" at 3142.51,1775 h30
  text "+" at 3105,1575 h40
  text "-" at 3110,1335 h40
  text "5V" at 1545,1050 h30
  text "RXD" at 1625,1050 h30
  text "TXD" at 1745,1050 h30
  text "G" at 1870,1050 h30
Bottom Overlay:
  drawing of 11 lines, arcs and shapes, not listed
  text "P23 GND" at 1680,3345 h26
  text "GND VCC" at 1675,3250 h26
  text "P5 SENP" at 1700,3145 h30
  text "SEN P34" at 1700,3040 h30
  text "P35 GND" at 1705,2945 h30
  text "P25 P26" at 1705,2845 h30
  text "P4  P27" at 1705,2745 h30
  text "P14 CLK" at 1705,2645 h30
  text "P12 CMD" at 1710,2545 h30
  text "Red Balloon Security" at 2195,2500 h40
  text "SD2 P13" at 1710,2440 h30
  text "SD0 SD3" at 1715,2340 h30
  text "P15 SD1" at 1705,2240 h30
  text "GND P2" at 1695,2145 h30
  text "nyan-sat.com" at 2135,1875 h60
  text "I2C_SCL2 IO21 / I2C_SDA2 IO22 / RXD2 IO16 / TXD2 IO17 / I2C_SCL IO18 / I2C_SDA IO19" at 1920,1395 h30
Mechanical 1:
  the board outline again, w10

## Dimensions
3380,1015 to 3380,3645 on Mechanical 6
1250,1125 to 3495,1130 on Mechanical 6

## Text inside footprints (layer, text, board x,y; h text height)
C14: Top Overlay "+" at 2855.76,2150.47 h59.06
C15: Top Overlay "+" at 2855.76,1890.47 h59.06
J1: Mechanical 6 "PCB EDGE" at 1253.07,1826.89 h11.81 r270
P8: Top Overlay "2" at 1340,2085 h25 r90; Top Overlay "1" at 1465,2085 h25 r90; Top Overlay "25" at 1520,3430 h25 r90